# Altium PCB MPPT_charger.PcbDoc
Units mil, origin at the board's own origin, x right, y up, seen from the top; angles counter-clockwise.
Board outline 1965 x 1965 mil, 2 copper layers (Top Layer, Bottom Layer), stack 62.8 mil thick; 68 components, 54 nets, 268 pads, 1306 vias.
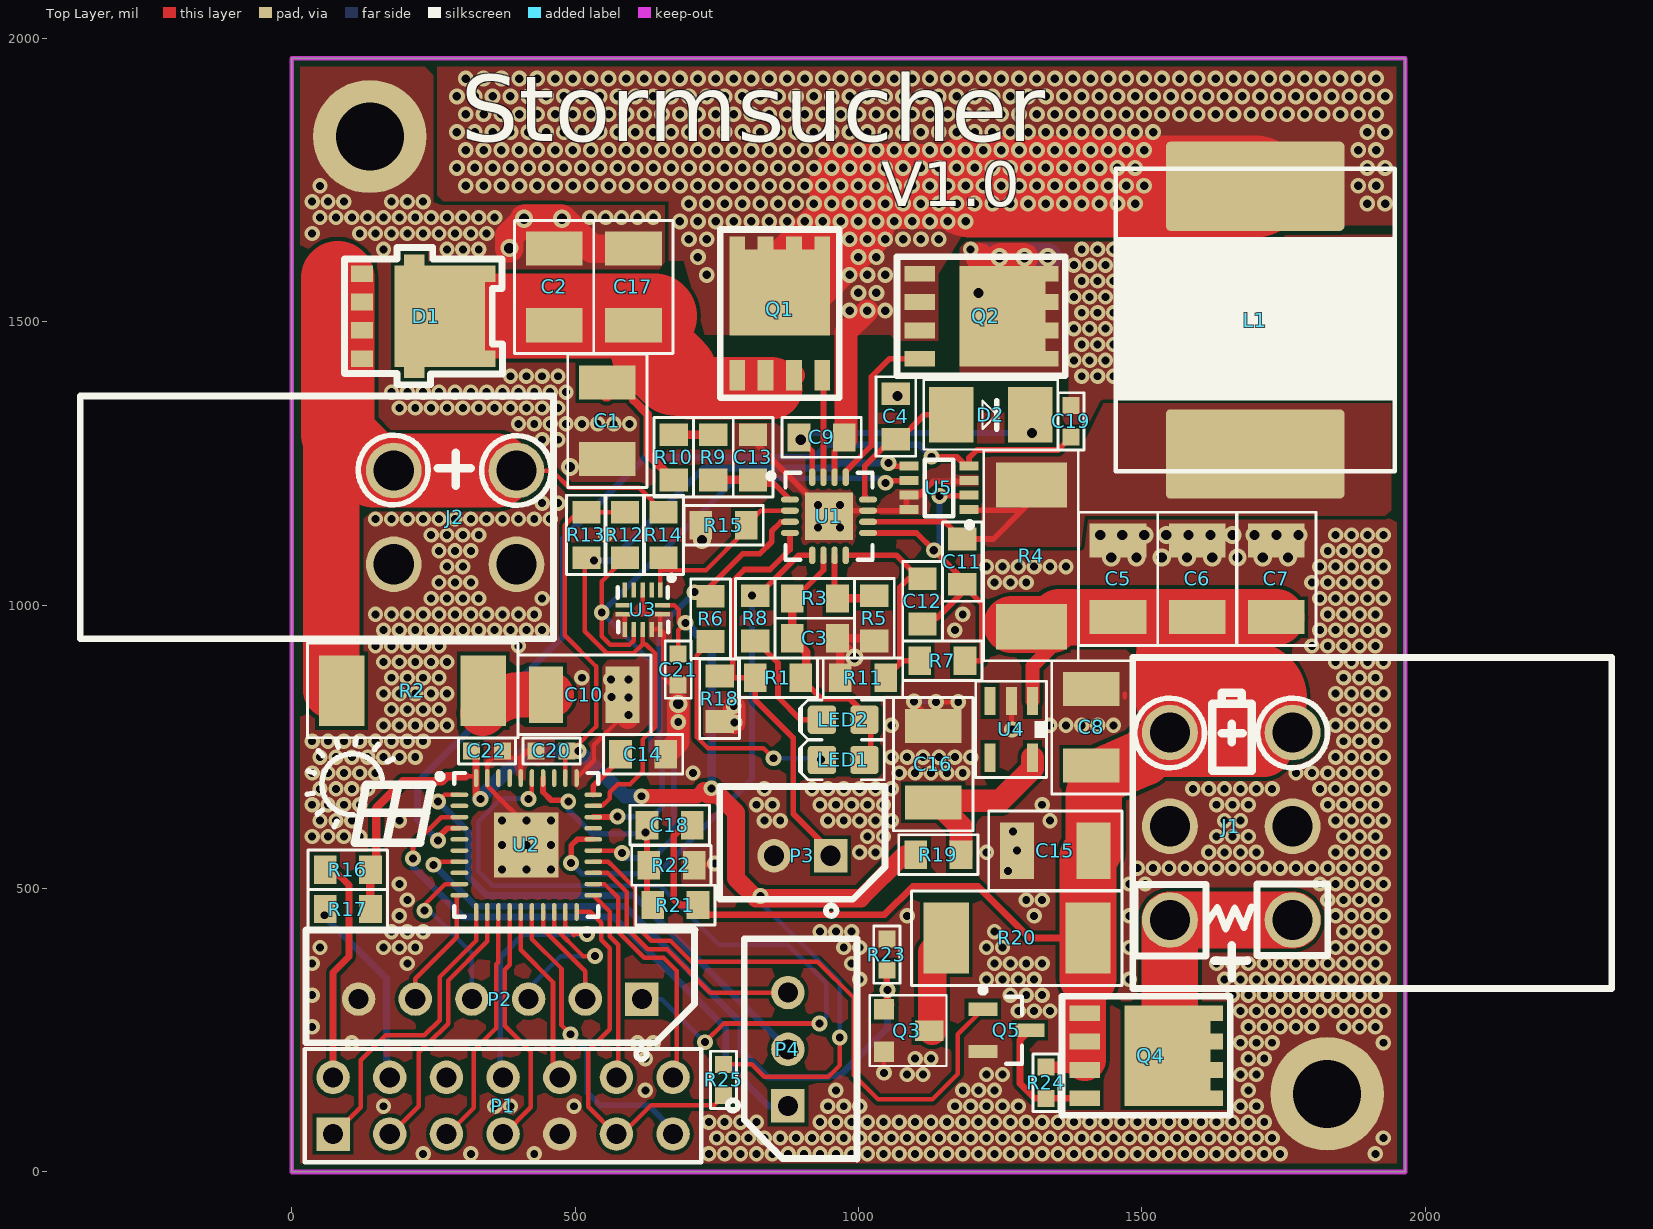
[diagram p0: Top Layer view]
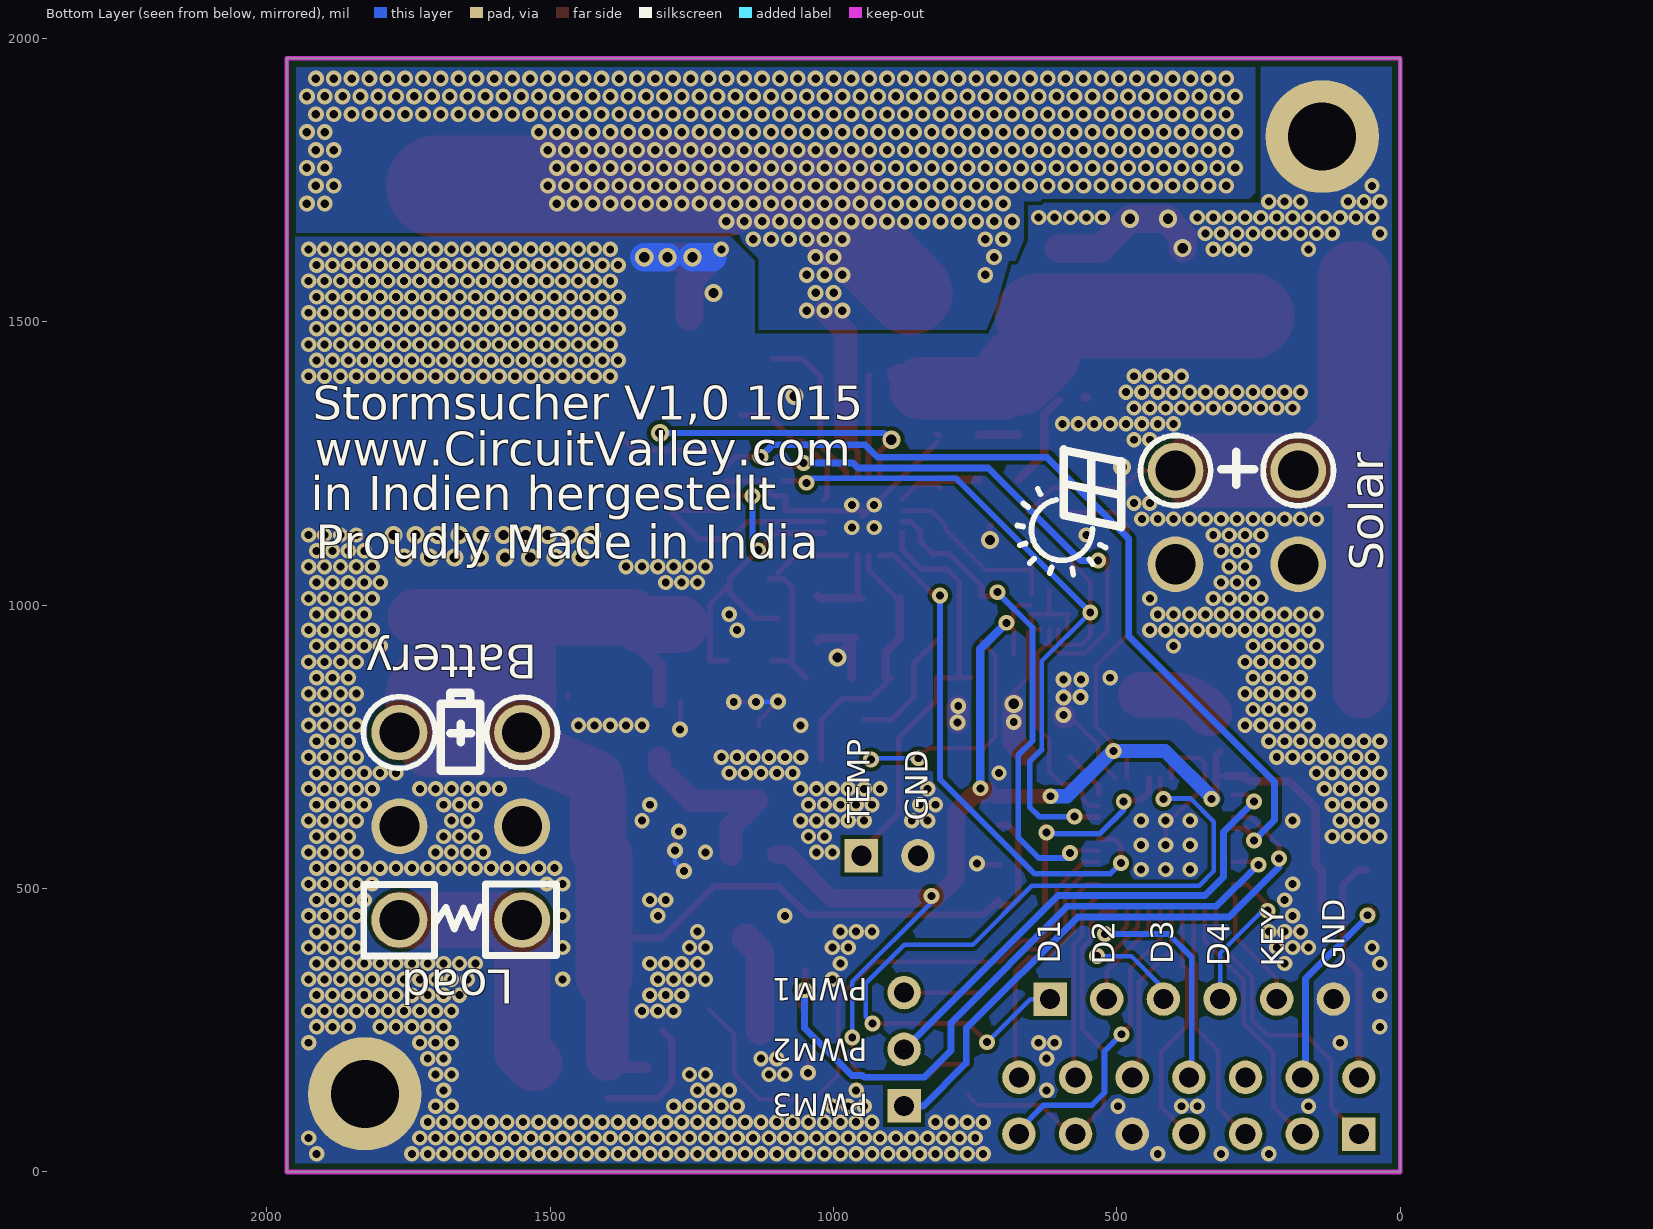
[diagram p1: Bottom Layer view, seen from below]

## Layer stack, top to bottom
Top Solder: solder mask 0.4, Solder Resist, Dk 3.5
Top Layer: signal copper 1.4
Dielectric 1: dielectric 60, FR-4, Dk 4.8
Bottom Layer: signal copper 1.4
Bottom Solder: solder mask 0.4, Solder Resist, Dk 3.5

## Board outline
0,0 1965,0 1965,1965 0,1965

## Design rules (kind name [scope] priority, off if disabled: settings)
Clearance [All] p1: gap=7
HoleSize [All] p1: absolutevalues=TRUE maxlimit=100 minlimit=12 maxpercent=80.000 minpercent=20.000
MinimumSolderMaskSliver [All] p1: minsoldermaskwidth=4
PolygonConnect [All] p1: connectstyle=Direct reliefconductorwidth=10 reliefentries=4 polygonreliefangle="90 Angle" airgapwidth=10
RoutingVias [All] p1: holewidth=20 width=32 viastyle="Through Hole" minholewidth=12 minwidth=25 maxholewidth=200 maxwidth=250
SilkToSolderMaskClearance [IsPad] p1: minsilkscreentomaskgap=6 clearancetoexposedcopper=TRUE
SolderMaskExpansion [All] p1: expansion=4
Width [All] p1: maxlimit=250 minlimit=8 preferedwidth=15
27 further rules are at their usual default settings.

## Components (designator, comment, footprint, x,y, rotation, side; value= is the part's Value field where it differs from the comment)
C1 "10uf" 1210C-GENERIC 557,1393 r270 top
C2 "10uf" 1210C-GENERIC 463,1494 r90 top
C3 "1uf" 0805C-GENERIC 893,942 r0 top
C4 "1uf" 0805C-GENERIC 1066,1303 r90 top
C5 "10uf" 1210C-GENERIC 1458,979 r90 top
C6 "10uf" 1210C-GENERIC 1598,979 r90 top
C7 "10uf" 1210C-GENERIC 1737,979 r90 top
C8 "10uf" 1210C-GENERIC 1411,717 r90 top
C9 "100nf" 0805C-GENERIC 965,1296 r180 top
C10 "2u2" 1210C-GENERIC 449,842 r0 top
C11 "100nf" 0805C-GENERIC 1183,1107 r270 top
C12 "22pf" 0805C-GENERIC 1113,1037 r270 top
C13 "1uf" 0805C-TBD 814,1231 r90 top
C14 "2u2" 0805C-GENERIC 650,737 r180 top
C15 "2u2" 1210C-GENERIC 1415,567 r180 top
C16 "2u2" 1210C-GENERIC 1132,652 r90 top
C17 "10uf" 1210C-GENERIC 603,1494 r90 top
C18 "22pf" 0805C-GENERIC 637,612 r0 top
C19 "100nF" 0603C-GENERIC 1375,1352 r270 top
C20 "100nF" 0603C-GENERIC 486,743 r180 top
C21 "100nF" 0603C-GENERIC 682,914 r270 top
C22 "100nF" 0603C-GENERIC 317,743 r0 top
D1 "NTS1045MFST1G" DFN5_5x6 234,1510 r90 top
D2 "MBRS140" DIODE-SMA 1129,1336 r180 top
J1 "1586041-6" 1586043-6 1766,610 r90 top
J2 "1586041-4" 1586043-4 180,1155 r270 top
L1 "10uh" SRP1238A 1700,1503 r270 top
LED1 "" LED-0805-K 973,727 r180 top
LED2 "" LED-0805-K 973,798 r180 top
P1 "Header 7X2A ISP" HDR2X7_CEN 73,67 r0 top
P2 "Header 6" 5267-06A 368,305 r180 top
P3 "Header 2" 5267-02A 901,558 r180 top
P4 "Header 3" 5267-03A 875.41,216.46 r90 top
Q1 "CSD18540Q5B" SON8 861,1515 r270 top
Q2 "CSD18540Q5B" SON8 1217,1510 r180 top
Q3 "FDN339" SOT23-GDS 1045,287 r0 top
Q4 "N-Mosfet" SON8 1508,205 r180 top
Q5 "BC847" SOT23_N 1261,250 r0 top
R1 "3.5K" 0805R-2K2 888,872 r180 top
R2 "2R / 2W" 2512R-GENERIC 213,849 r180 top
R3 "10K" 0805R-2K2 953,1012 r180 top
R4 "" 2512R-GENERIC 1305,1087 r270 top
R5 "10K" 0805R-2K2 1028,947 r90 top
R6 "1K" 0805R-2K2 739,946 r90 top
R7 "102K" 0805R-2K2 1178,902 r180 top
R8 "1K" 0805R-2K2 818,947 r90 top
R9 "5R" 0805R-2K2 744,1291 r270 top
R10 "5R" 0805R-2K2 674,1231 r90 top
R11 "34.8K" 0805R-2K2 978,872 r0 top
R12 "3.9K" 0805R-2K2 588,1094 r90 top
R13 "3.9K" 0805R-2K2 520,1094 r90 top
R14 "150K" 0805R-2K2 656,1094 r90 top
R15 "50K /NC" 0805R-2K2 732,1141 r0 top
R16 "0R" 0805R-2K2 129,533 r180 top
R17 "0R" 0805R-2K2 129,464 r180 top
R18 "15K" 0805R-2K2 755,865 r270 top
R19 "0R" 0805R-2K2 1111,560 r0 top
R20 "2512R-GENERIC" 2512R-GENERIC 1280,413 r0 top
R21 "105K" 0805R-2K2 707,471 r180 top
R22 "15K" 0805R-2K2 700,541 r180 top
R23 "10K" 0603R-10K 1050,411 r270 top
R24 "10K" 0603R-10K 1331,185 r270 top
R25 "10K" 0603R-10K 762,190 r270 top
U1 "BQ24650RVAT" QFN16 948,1157 r0 top
U2 "MSP430FR5739IRHAR" QFN40 414,577 r0 top
U3 "TPL0102" XQFN14_2mmx2mm 619.16,992.13 r180 top
U4 "TPS709" SOT23-5 1307,831 r270 top
U5 "INA219" SOT23-8 1142,1207 r180 top

## Footprints (in the part's own frame and the unit in brackets; to place one, negate y for a bottom-side part, rotate by r counter-clockwise, add the part's x,y. Pads: shape width x height; smd on the part's side, far side on the other; paste and mask are expansions set on the pad)
0603C-GENERIC [mil] "CAPACITOR 0603"
  rect 30x30 smd: 1(0,0) 2(55,0)
  silkscreen extent -23,-23 78,23, body extent -4,-15 59,15, height 19
0603R-10K [mil] "RESISTOR 0603"
  rect 30x30 smd: 1(0,0) 2(55,0)
  silkscreen extent -23,-23 78,23, body extent -4,-15 59,15, height 20
0805C-GENERIC [mil] "CAPACITOR 0805"
  rect 40x50 smd: 1(-10,0) 2(70,0)
  silkscreen extent -40,-35 100,35, body extent -11,-25 70,25, height 26
0805C-TBD [mil] "CAPACITOR 0805"
  rect 40x50 smd: 1(-10,0) 2(70,0)
  silkscreen extent -40,-35 100,35, body extent -11,-25 70,25, height 26
0805R-2K2 [mil] "RESISTOR 0805"
  rect 40x50 smd: 1(-10,0) 2(70,0)
  silkscreen extent -40,-35 100,35, body extent -11,-25 70,25, height 27
1210C-GENERIC [mil]
  rect 60x100 smd: 1(0,0) 2(135,0)
  silkscreen extent -50,-70 185,70, body extent -10,-50 145,50, height 46
2512R-GENERIC [mil]
  rect 80x125 smd: 1(-125,0) 2(125,0)
  silkscreen extent -186,-84 185,83, body extent -139,-61 136,61, height 19
5267-02A [mm]
  rect 1.5x1.5 hole 0.9: 1(-1.27,0)
  round 1.5 hole 0.9: 2(1.27,0)
  silkscreen extent -3.7,-3.1 3.7,2.7, body extent -3.67,-3.08 3.73,1.82, height 5.81
5267-03A [mm]
  rect 1.5x1.5 hole 0.9: 1(-2.54,0)
  round 1.5 hole 0.9: 2(0,0) 3(2.54,0)
  silkscreen extent -4.92,-3.1 4.95,2.7, body extent -4.9,-3.1 5,1.8, height 5.81
5267-06A [mm]
  rect 1.5x1.5 hole 0.9: 1(-6.35,0)
  round 1.5 hole 0.9: 2(-3.81,0) 3(-1.27,0) 4(1.27,0) 5(3.81,0) 6(6.35,0)
  silkscreen extent -8.73,-3.1 8.7,2.7, body extent -8.67,-3.05 8.73,1.85, height 5.81
1586043-4 [mm]
  round 2.5 hole 1.8: 1(-2.1,0) 2(2.1,0) 3(-2.1,5.5) 4(2.1,5.5)
  silkscreen extent -5.44,-14.05 5.44,7.16, body extent -4.66,-14.06 5.44,6.08, height 11.21
1586043-6 [mm]
  round 2.5 hole 1.8: 1(-4.2,0) 2(0,0) 3(4.2,0) 4(-4.2,5.5) 5(0,5.5) 6(4.2,5.5)
  silkscreen extent -7.26,-14.3 7.57,7.16, body extent -6.93,-14.11 7.37,6.03, height 11.21
DFN5_5x6 [mm]
  rect 0.75x1 smd: 1(-1.905,2.795) 1(-0.635,2.795) 1(0.635,2.795) 1(1.905,2.795)
  rect 0.495x0.905 smd: 2(-2.528,0.452) 2(2.528,0.452)
  rect 0.75x0.475 smd: 2(-1.905,-2.962) 2(1.905,-2.962)
  rect 4.56x4.055 smd: 2(0,-0.697)
  silkscreen extent -3.07,-3.51 3.07,3.58, body extent -2.55,-3.1 2.6,3.05, height 1.13
DIODE-SMA [mm]
  rect 2x2.5 smd: A(-0.875,0) K(-4.425,0)
  silkscreen extent -5.65,-1.58 0.35,1.55, body extent -5.2,-1.3 0,1.3, height 2.4
HDR2X7_CEN [mm] "Connector; Header; 7x2 Position"
  rect 1.5x1.5 hole 0.9: 1(0,0)
  round 1.5 hole 0.9: 2(2.54,0) 3(5.08,0) 4(7.62,0) 5(10.16,0) 6(12.7,0) 7(15.24,0) 8(0,2.54) 9(2.54,2.54) 10(5.08,2.54) 11(7.62,2.54) 12(10.16,2.54) 13(12.7,2.54) 14(15.24,2.54)
  silkscreen extent -1.27,-1.27 16.51,3.81
LED-0805-K [mil]
  round 20 on Mech14: 0(0,0)
  rrect25% 50x50 smd: A(-37.5,0) K(37.5,0)
  Top Layer pour cut-out: -15,30 15,30 15,-30 -15,-30
  silkscreen extent -72,-35 77,35, body extent -39,-25 39,25, height 31
QFN16 [mm]
  oval 0.8x0.28 smd paste-0.025 mask+0.07: 1(-1.75,0.75) 2(-1.75,0.25) 3(-1.75,-0.25) 4(-1.75,-0.75) 9(1.75,-0.75) 10(1.75,-0.25) 11(1.75,0.25) 12(1.75,0.75)
  oval 0.28x0.8 smd paste-0.025 mask+0.07: 5(-0.75,-1.75) 6(-0.25,-1.75) 7(0.25,-1.75) 8(0.75,-1.75) 13(0.75,1.75) 14(0.25,1.75) 15(-0.25,1.75) 16(-0.75,1.75)
  rect 2.14x2.14 smd paste-1.07 mask+0.07: 17(0,0)
  silkscreen extent -2.72,-1.95 1.95,1.95, body extent -1.8,-1.8 1.8,1.8, height 1
QFN40 [mm]
  oval 0.8x0.2 smd: 1(-3,2.25) 2(-3,1.75) 3(-3,1.25) 4(-3,0.75) 5(-3,0.25) 6(-3,-0.25) 7(-3,-0.75) 8(-3,-1.25) 9(-3,-1.75) 10(-3,-2.25) 21(3,-2.25) 22(3,-1.75) 23(3,-1.25) 24(3,-0.75) 25(3,-0.25) 26(3,0.25) 27(3,0.75) 28(3,1.25) 29(3,1.75) 30(3,2.25)
  oval 0.2x0.8 smd: 11(-2.25,-3) 12(-1.75,-3) 13(-1.25,-3) 14(-0.75,-3) 15(-0.25,-3) 16(0.25,-3) 17(0.75,-3) 18(1.25,-3) 19(1.75,-3) 20(2.25,-3) 31(2.25,3) 32(1.75,3) 33(1.25,3) 34(0.75,3) 35(0.25,3) 36(-0.25,3) 37(-0.75,3) 38(-1.25,3) 39(-1.75,3) 40(-2.25,3)
  rect 2.9x2.9 smd: 41(0,0)
  silkscreen extent -4,-3.22 3.22,3.22, body extent -3.08,-3.08 3.08,3.08, height 1
SON8 [mm]
  rect 1.372x0.71 smd: 1(2.77,-0.635) 1(2.77,0.635) 1(2.77,-1.905) 4(2.77,1.905)
  rect 0.59x0.71 smd: 5(-3.15,1.905) 5(-3.15,-0.635) 5(-3.15,0.635) 5(-3.15,-1.905)
  rect 3.85x4.52 smd: 5(-0.941,0)
  silkscreen extent -3.76,-2.67 3.78,2.67, body extent -3.18,-2.5 2.82,2.5, height 1.06
SOT23-5 [mil]
  rect 50x20 smd: 1(0,0) 2(0,-37) 3(0,-75) 4(100,-75) 5(100,0)
  silkscreen extent -35,-100 135,25, body extent 2,-95 98,20, height 52
SOT23-8 [mm]
  rect 0.85x0.4 smd: 1(-1.35,0.975) 2(-1.35,0.325) 3(-1.35,-0.325) 4(-1.35,-0.975) 5(1.35,-0.975) 6(1.35,-0.325) 7(1.35,0.325) 8(1.35,0.975)
  silkscreen extent -1.49,-1.27 0.64,1.78, body extent -1.45,-1.45 1.35,1.45, height 0.97
SOT23-GDS [mil]
  rect 50x36 smd: D(80,-38)
  rect 36x36 smd: G(0,0) S(0,-75)
  silkscreen extent -25,-100 110,25, body extent -3,-95 94,20, height 41
SOT23_N [mm] "SOT23, 3-Leads, Body 2.9x1.3mm, Pitch 0.95mm, Lead Span 2.3mm, IPC Medium Density"
  rect 1.3x0.6 smd: 1(-1.05,0.95) 2(-1.05,-0.95) 3(1.05,0)
  silkscreen extent -1.17,-1.5 0.7,1.92, body extent -0.7,-1.5 0.7,1.5, height 1.1
SRP1238A [mm]
  rrect10% 4x8 smd: 1(-6,0) 2(6,0)
  silkscreen extent -6.78,-6.25 6.78,6.25, body extent -6.25,-6.3 6.25,6.2, height 7.51
XQFN14_2mmx2mm [mm]
  rect 0.2x0.68 smd mask+0.102: 1(-0.8,-0.885)
  rect 0.2x0.68 smd: 2(-0.4,-0.885) 3(0,-0.885) 4(0.4,-0.885) 5(0.8,-0.885) 8(0.8,0.885) 9(0.4,0.885) 10(0,0.885) 11(-0.4,0.885) 12(-0.8,0.885)
  rect 0.68x0.2 smd: 6(0.885,-0.2) 7(0.885,0.2) 13(-0.885,0.2) 14(-0.885,-0.2)
  silkscreen extent -1.4,-1.53 1.12,1.02, body extent -1.02,-1.02 1.02,1.02, height 0.4

## Part data
C1 C2 C5 C6 C7 C8 C10 C15 C16 C17: library part 1210C-2u2-35V, "GENERIC CAPACITOR NON POLARISED 1210"
C3 C4 C9 C11 C12 C14 C18: library part 0805C-2U2-6V3-X5R-PAN, "CAPACITOR 0805 CERAMIC"
C13: library part 0805C-TBD, "CAPACITOR 0805 CERAMIC VALUE TO BE DETERMINED"
C19 C20 C21 C22: library part 0603C-100NF-25V-X7R-TDK, "CAPACITOR 0603 CERAMIC"
D1: library part SK3200
D2: "DIODE"
L1: library part inductor_smd
LED1 LED2: library part LED_SMD_Green_0805, "LED, 0805 SMD, Green"
P1: library part "Header 7X2A", "Header, 7-Pin, Dual row"
P2: "Header, 6-Pin"
P3: "Header, 2-Pin"
P4: "Header, 3-Pin"
Q1 Q2: library part N-Mosfet
Q3: "N-MOS TRANSISTOR FDN339"
Q5: "NPN General-purpose Transistor"
R1 R3 R5 R6 R7 R8 R9 R10 R11 R12 R13 R14 R15 R16 R17 R18 R19 R21 R22: library part 0805R-2K2, "RESISTOR 0805 1/4 WATT THIN FILM"
R2 R4: library part 2512R-GENERIC, "GENERIC RESISTOR 2512"
R20: "GENERIC RESISTOR 2512"
R23 R24 R25: library part 0603R-10K, "GENERIC RESISTOR 0603"
U1: "High Efficiency Synchronous Switch-Mode Charger Controller- Solar Battery Charger, 5 V, -40 to 85 degC, 16-pin VQFN (RVA), Green (RoHS & no Sb/Br)"
U2: "24 MHz Mixed Signal Microcontroller, 1024 B SRAM and 33 GPIOs, -40 to 85 degC, 40-pin QFN (RHA), Green (RoHS & no Sb/Br)"
U3: "Digital Pot 2 channel 256 setp nov volatile memeory"

## Free pads (board coordinates)
  round 200 hole 120: 0(137.8,1827) 1(1827,137.8)

## Via types
v1: diameter 27, hole 14, Top Layer to Bottom Layer, tented both sides, 821 vias
v2: diameter 27.99, hole 15, Top Layer to Bottom Layer, tented both sides, 387 vias
v3: diameter 28, hole 14, Top Layer to Bottom Layer, tented both sides, 52 vias
v4: diameter 32, hole 18, Top Layer to Bottom Layer, tented both sides, 32 vias
v5: diameter 27, hole 14, Top Layer to Bottom Layer, 13 vias
v6: diameter 28, hole 15, Top Layer to Bottom Layer, tented both sides, 1 vias

## Nets (pads, with @x,y where several pads share a name; then routed paths per layer and width w, separated by ;. In a path a pad name is that pad's centre, name@x,y a point inside that pad or via, vN(x,y) a via of type N, cw(c..) or ccw(c..) an arc to the next point about the centre after c; other vN are vias at no path point)
BLOAD: Q3.G R23.2 U2.7 | length 1245.4
  Top Layer w8: v3(250,542) 255.47,547.47 U2.7
  Top Layer w12: R23.2 1050,287 1058,295 1051,302 v3(1051,321)
  Bottom Layer w12: v3(250,542) 251,542 324,469 587,469 793,263 793,214 840,167 945.52,167 949.02,170.5 967.5,170.5 1051,254 v3(1051,321)
CTS: P1.12 U2.15 | length 322.4
  Top Layer w8: U2.15 404.16,391.84 461,335 461,177 P1.12@473,165
GND: C1.2 C2.2 C3.2 C4.2 C5.2 C6.2 C7.2 C8.2 C10.2 C13.2 C14.1 C15.2 C16.2 C17.2 C19.1 C20.2 C21.2 C22.2 J1.2 J1.5 J2.2 J2.4 P1.5 P2.6 P3.2 pad.0 pad.1 Q2.5 Q3.S Q5.2 R5.1 R11.1 R15.1 R18.2 R22.1 R23.1 U1.11 U1.17 U2.31 U2.36 U2.39 U2.41 U3.3 U3.7 U3.8 U3.11 U3.12 U3.13 U4.2 U5.3 U5.7 U5.8 | length 2571.1
  Top Layer w8: 404.16,731.16 354.16,731.16 345.1,722.1 U2.39 345.1,681.25 358,668.36 358,667.36 385.36,640 387,640 414,613 v5(414,577) ; U2.31 533,725.53 533,753 582,802 C10.2@593,802 ; v3(564,838) 565,839 C10.2@594,839 ; C10.2 584,862 C10.2@591,869 ; U3.8 587.66,980.91 U3.7 619.16,984.25 ; U3.3 619.16,984.25 ; U3.11 U3.12 ; C21.2@682,847 656,873 656,951.94 U3.12 ; v3(1045,175) Q3.S ; v3(1098,830) 1132,796 C16.2 ; v3(1137,829) v3(1176,829) ; U4.2 1270,782 v3(1271,781) ; v3(1273,601) 1280,594 v3(1280,567) ; 1470,838 1470,844 ; 619.16,984.25 U3.13 650.65,980.91 U3.12
  Top Layer w10: U2.36 404.16,731.16 416,743 C20.2 ; R22.1@707,542 745,542 v3(747,544) ; R15.1 723,1141 724,1140 v4(724,1115) ; C13.2 C13.2@819,1301 ; C13.2@818,1287 U1.17 948,1166.84 1084.08,1166.84 1084.85,1167.61 1084.85,1193.2 1106.44,1193.2 1132.23,1219 1190.94,1219 U5.3@1191.15,1218.8
  Top Layer w15: R11.1 C3.2@968,937 ; v4@995,910 C3.2@968,937 ; R5.1 1023,942 C3.2 C3.2@968,937
  Top Layer w40: C10.2@593,802 C10.2@593,806 ; C14.1 682,759 v3(682,794) v4(682,826) ; v3(780,822) 781,821 v3(781,793)
  Top Layer w50: v4(384,1630) 384,1652 v4@414,1682 ; v4(410,1682) v4(477,1682) 530,1629 C17.2 ; 1214,1614 1254.05,1573.95 Q2.5@1254.05,1510 ; v4(1249,1614) v4(1293,1614)
  Bottom Layer w8: v3@563,866 564,865 v3(564,838) ; v3@591,869 594,866 v3@594,839 ; v3(1098,830) 1136,830 v3(1137,829) ; v3(1264,531) 1280,547 v3(1280,567) ; v3(1273,601) v3@1276,601
  Bottom Layer w50: 1214,1614 v4(1249,1614) ; v4(1293,1614) v4(1334,1614)
  other v1: 232,32 316,32 428,32 736,32 764,32 792,32 820,32 848,32 876,32 904,32 932,32 960,32 988,32 1016,32 1044,32 1072,32 1100,32 1128,32 1156,32 1184,32 1212,32 1240,32 1268,32 1296,32 1324,32 1352,32 1380,32 1408,32 1436,32 1464,32 1492,32 1520,32 1548,32 1576,32 1604,32 1632,32 1660,32 1688,32 1716,32 1744,32 1912,32 750,60 778,60 806,60 834,60 862,60 890,60 918,60 946,60 974,60 1002,60 1030,60 1058,60 1086,60 1114,60 1142,60 1170,60 1198,60 1226,60 1254,60 1282,60 1310,60 1338,60 1366,60 1394,60 1422,60 1450,60 1478,60 1506,60 1534,60 1562,60 1590,60 1618,60 1646,60 1674,60 1702,60 1730,60 1926,60 736,88 764,88 792,88 820,88 932,88 960,88 988,88 1016,88 1044,88 1072,88 1100,88 1128,88 1156,88 1184,88 1212,88 1240,88 1268,88 1296,88 1324,88 1352,88 1380,88 1408,88 1436,88 1464,88 1492,88 1520,88 1548,88 1576,88 1604,88 1632,88 1660,88 1688,88 1716,88 162,116 358,116 386,116 498,116 946,116 974,116 1002,116 1170,116 1198,116 1226,116 1254,116 1282,116 1674,116 1702,116 624,144 960,144 1184,144 1212,144 1240,144 1688,144 1086,172 1114,172 1226,172 1254,172 1674,172 1702,172 624,200 1100,200 1128,200 1688,200 1716,200 106,228 610,228 638,228 1674,228 1702,228 1730,228 1926,228 36,256 1688,256 1716,256 1744,256 1772,256 1800,256 1856,256 1884,256 1912,256 1282,284 1310,284 1338,284 1674,284 1702,284 1730,284 1758,284 1786,284 1814,284 1842,284 1870,284 1898,284 1926,284 36,312 1268,312 1296,312 1324,312 1660,312 1688,312 1716,312 1744,312 1772,312 1800,312 1828,312 1856,312 1884,312 1912,312 1002,340 1226,340 1254,340 1282,340 1310,340 1478,340 1646,340 1674,340 1702,340 1730,340 1758,340 1786,340 1814,340 1842,340 1870,340 1898,340 1926,340 36,368 204,368 988,368 1240,368 1268,368 1296,368 1324,368 1632,368 1660,368 1688,368 1716,368 1744,368 1772,368 1800,368 1828,368 1856,368 1884,368 1912,368 50,396 162,396 190,396 218,396 974,396 1002,396 1226,396 1254,396 1478,396 1842,396 1870,396 1898,396 1926,396 176,424 204,424 232,424 932,424 960,424 988,424 1240,424 1856,424 1884,424 1912,424 190,452 1086,452 1310,452 1478,452 1842,452 1870,452 1898,452 1926,452 204,480 1296,480 1324,480 1828,480 1856,480 1884,480 1912,480 190,508 1478,508 1506,508 1814,508 1842,508 1870,508 1898,508 1926,508 1492,536 1520,536 1548,536 1576,536 1604,536 1632,536 1660,536 1688,536 1716,536 1744,536 1772,536 1800,536 1828,536 1856,536 1884,536 1912,536 1002,564 1030,564 1226,564 1618,564 1646,564 1674,564 1702,564 1842,564 1870,564 1898,564 1926,564 36,592 64,592 92,592 120,592 1016,592 1044,592 1632,592 1660,592 1688,592 1856,592 1884,592 1912,592 50,620 78,620 106,620 190,620 834,620 862,620 946,620 974,620 1002,620 1030,620 1058,620 1338,620 1646,620 1674,620 1842,620 1870,620 1898,620 1926,620 36,648 64,648 92,648 120,648 820,648 848,648 932,648 960,648 988,648 1016,648 1044,648 1324,648 1632,648 1660,648 1688,648 1828,648 1856,648 1884,648 1912,648 50,676 78,676 106,676 134,676 834,676 918,676 946,676 974,676 1002,676 1030,676 1058,676 1590,676 1618,676 1646,676 1674,676 1702,676 1730,676 1814,676 1842,676 1870,676 1898,676 1926,676 36,704 64,704 92,704 120,704 148,704 708,704 1072,704 1100,704 1128,704 1156,704 1184,704 1772,704 1800,704 1828,704 1856,704 1884,704 1912,704 50,732 78,732 106,732 134,732 162,732 190,732 218,732 1058,732 1086,732 1114,732 1142,732 1170,732 1198,732 1842,732 1870,732 1898,732 1926,732 36,760 64,760 92,760 120,760 148,760 176,760 204,760 232,760 1856,760 1884,760 1912,760 162,788 190,788 218,788 246,788 274,788 1058,788 1338,788 1366,788 1394,788 1422,788 1450,788 1842,788 1870,788 1898,788 1926,788 176,816 204,816 232,816 260,816 1856,816 1884,816 1912,816 162,844 190,844 218,844 246,844 274,844 1842,844 1870,844 1898,844 1926,844 176,872 204,872 232,872 260,872 512,872 1856,872 1884,872 1912,872 162,900 190,900 218,900 246,900 274,900 1842,900 1870,900 1898,900 1926,900 148,928 176,928 204,928 232,928 260,928 400,928 1800,928 1828,928 1856,928 1884,928 1912,928 162,956 190,956 218,956 246,956 274,956 302,956 330,956 358,956 386,956 414,956 442,956 1170,956 1814,956 1842,956 1870,956 1898,956 1926,956 148,984 176,984 204,984 232,984 260,984 288,984 316,984 344,984 372,984 400,984 428,984 1184,984 1828,984 1856,984 1884,984 1912,984 246,1012 274,1012 302,1012 330,1012 442,1012 1814,1012 1842,1012 1870,1012 1898,1012 1926,1012 260,1040 288,1040 316,1040 1240,1040 1268,1040 1296,1040 1800,1040 1828,1040 1856,1040 1884,1040 1912,1040 274,1068 302,1068 1226,1068 1254,1068 1282,1068 1310,1068 1338,1068 1366,1068 1814,1068 1842,1068 1870,1068 1898,1068 1926,1068 260,1096 288,1096 316,1096 1828,1096 1856,1096 1884,1096 1912,1096 246,1124 274,1124 302,1124 330,1124 554,1124 1842,1124 1870,1124 1898,1124 1926,1124 148,1152 176,1152 204,1152 232,1152 260,1152 288,1152 316,1152 344,1152 372,1152 400,1152 428,1152 456,1152 442,1180 470,1180 442,1292 470,1292 400,1320 428,1320 456,1320 484,1320 512,1320 540,1320 568,1320 596,1320 190,1348 218,1348 246,1348 274,1348 302,1348 330,1348 358,1348 386,1348 414,1348 442,1348 470,1348 176,1376 204,1376 232,1376 260,1376 288,1376 316,1376 344,1376 372,1376 400,1376 428,1376 456,1376 484,1376 386,1404 414,1404 442,1404 470,1404 1394,1404 1422,1404 1450,1404 1478,1404 1506,1404 1534,1404 1562,1404 1590,1404 1618,1404 1646,1404 1674,1404 1702,1404 1730,1404 1758,1404 1786,1404 1814,1404 1842,1404 1870,1404 1898,1404 1926,1404 1380,1432 1408,1432 1436,1432 1464,1432 1492,1432 1520,1432 1548,1432 1576,1432 1604,1432 1632,1432 1660,1432 1688,1432 1716,1432 1744,1432 1772,1432 1800,1432 1828,1432 1856,1432 1884,1432 1912,1432 1394,1460 1422,1460 1450,1460 1478,1460 1506,1460 1534,1460 1562,1460 1590,1460 1618,1460 1646,1460 1674,1460 1702,1460 1730,1460 1758,1460 1786,1460 1814,1460 1842,1460 1870,1460 1898,1460 1926,1460 1380,1488 1408,1488 1436,1488 1464,1488 1492,1488 1520,1488 1548,1488 1576,1488 1604,1488 1632,1488 1660,1488 1688,1488 1716,1488 1744,1488 1772,1488 1800,1488 1828,1488 1856,1488 1884,1488 1912,1488 1394,1516 1422,1516 1450,1516 1478,1516 1506,1516 1534,1516 1562,1516 1590,1516 1618,1516 1646,1516 1674,1516 1702,1516 1730,1516 1758,1516 1786,1516 1814,1516 1842,1516 1870,1516 1898,1516 1926,1516 1380,1544 1408,1544 1436,1544 1464,1544 1492,1544 1520,1544 1548,1544 1576,1544 1604,1544 1632,1544 1660,1544 1688,1544 1716,1544 1744,1544 1772,1544 1800,1544 1828,1544 1856,1544 1884,1544 1912,1544 1394,1572 1422,1572 1450,1572 1478,1572 1506,1572 1534,1572 1562,1572 1590,1572 1618,1572 1646,1572 1674,1572 1702,1572 1730,1572 1758,1572 1786,1572 1814,1572 1842,1572 1870,1572 1898,1572 1926,1572 1380,1600 1408,1600 1436,1600 1464,1600 1492,1600 1520,1600 1548,1600 1576,1600 1604,1600 1632,1600 1660,1600 1688,1600 1716,1600 1744,1600 1772,1600 1800,1600 1828,1600 1856,1600 1884,1600 1912,1600 162,1628 274,1628 302,1628 330,1628 1198,1628 1394,1628 1422,1628 1450,1628 1478,1628 1506,1628 1534,1628 1562,1628 1590,1628 1618,1628 1646,1628 1674,1628 1702,1628 1730,1628 1758,1628 1786,1628 1814,1628 1842,1628 1870,1628 1898,1628 1926,1628 36,1656 120,1656 148,1656 176,1656 204,1656 232,1656 260,1656 288,1656 316,1656 344,1656 50,1684 78,1684 106,1684 134,1684 162,1684 190,1684 218,1684 246,1684 274,1684 302,1684 330,1684 358,1684 526,1684 554,1684 582,1684 610,1684 638,1684 36,1712 64,1712 92,1712 176,1712 204,1712 232,1712 50,1740
  other v3: 594,806 594,837.5 563,869 594,869
  other v4: 993,908 1446,1084 1490.57,1084 1535.14,1084 1579.71,1084 1624.29,1084 1668.86,1084 1713.43,1084 1758,1084 1426.56,1124 1465.44,1124 1504.33,1124 1543.22,1124 1582.11,1124 1621,1124 1659.89,1124 1698.78,1124 1737.67,1124 1776.56,1124 491,1244 1069,1369 1212,1551
  other v5: 370.69,533.69 414,533.69 457.31,533.69 370.69,577 457.31,577 370.69,620.31 414,620.31 457.31,620.31 928.31,1137.31 967.69,1137.31 928.31,1176.68 967.69,1176.68
INA_PWR: C19.2 U2.4 U5.4 | length 1717
  Top Layer w10: v3(258,585) 253,585 274.53,606.53 U2.4 ; v3(1129,1262) 1173.54,1262 U5.4@1191.15,1244.39 ; U5.4 1195.15,1260.15 1209,1274 1352,1274 C19.2
  Bottom Layer w12: v3(258,585) 222,621 222,688 479,945 479,1117 623,1261 922,1261 944,1283 1108,1283 v3(1129,1262)
KEY: P2.5 U2.10 | length 215.7
  Top Layer w8: P2.5 218,341 291,414 291,483.53 U2.10
LOAD: J1.1 J1.4 Q4.5 | length 478.1
  Top Layer w100: Q4.5@1528,192 1549.46,213.46 J1.4 J1.1
MPPSET: R14.1 R15.2 U1.2 U3.1 | length 333.9
  Top Layer w8: U3.1@650.65,1017.97 R14.1@650.65,1076.63 ; 652,1062 731,1062 802,1133 R15.2 827.84,1166.84 U1.2
NetC4_1: C4.1 D2.A U1.12 | length 251.5
  Top Layer w10: U1.12 1011,1192.43 1011,1245.77 1054.23,1289 1069,1289 1116,1336 D2.A
NetC9_1: C9.1 L1.1 Q1.5 Q2.1 U1.14 | length 1206.3
  Top Layer w10: U1.14 957.84,1271.84 C9.1@978,1292
  Top Layer w40: C9.1@978,1292 978,1481.93 v2(1015.78,1519.72)
  Top Layer w150: Q1.5@865,1552.05 v2@989.17,1676.22 ; v2@987.17,1739.22 v2@1198.78,1739.22
  Top Layer w180: v2@1198.78,1739.22 L1.1
  other v2: 984.29,1519.72 1047.28,1519.72 1000.04,1551.21 1031.53,1551.21 732.32,1582.71 984.29,1582.71 1015.78,1582.71 1047.28,1582.71 716.57,1614.2 1000.04,1614.2 1031.53,1614.2 700.82,1645.7 732.32,1645.7 984.29,1645.7 1015.78,1645.7 1047.28,1645.7 1078.78,1645.7 1110.27,1645.7 1141.77,1645.7 685.07,1677.2 716.57,1677.2 748.07,1677.2 779.56,1677.2 811.06,1677.2 842.55,1677.2 874.05,1677.2 905.55,1677.2 937.04,1677.2 968.54,1677.2 1000.04,1677.2 1031.53,1677.2 1063.03,1677.2 1094.52,1677.2 1126.02,1677.2 1157.52,1677.2 1189.01,1677.2 700.82,1708.69 732.32,1708.69 763.81,1708.69 795.31,1708.69 826.81,1708.69 858.3,1708.69 889.8,1708.69 921.29,1708.69 952.79,1708.69 984.29,1708.69 1015.78,1708.69 1047.28,1708.69 1078.78,1708.69 1110.27,1708.69 1141.77,1708.69 1173.26,1708.69 1204.76,1708.69 1236.26,1708.69 1267.75,1708.69 1299.25,1708.69 1330.74,1708.69 1362.24,1708.69 1393.74,1708.69 1425.23,1708.69 1456.73,1708.69 1488.22,1708.69 1897.67,1708.69 1929.17,1708.69 307.12,1740.19 338.62,1740.19 370.11,1740.19 401.61,1740.19 433.11,1740.19 464.6,1740.19 496.1,1740.19 527.59,1740.19 559.09,1740.19 590.59,1740.19 622.08,1740.19 653.58,1740.19 685.07,1740.19 716.57,1740.19 748.07,1740.19 779.56,1740.19 811.06,1740.19 842.55,1740.19 874.05,1740.19 905.55,1740.19 937.04,1740.19 968.54,1740.19 1000.04,1740.19 1031.53,1740.19 1063.03,1740.19 1094.52,1740.19 1126.02,1740.19 1157.52,1740.19 1189.01,1740.19 1220.51,1740.19 1252,1740.19 1283.5,1740.19 1315,1740.19 1346.49,1740.19 1377.99,1740.19 1409.48,1740.19 1440.98,1740.19 1472.48,1740.19 1503.97,1740.19 1881.93,1740.19 1913.42,1740.19 291.37,1771.69 322.87,1771.69 354.37,1771.69 385.86,1771.69 417.36,1771.69 448.85,1771.69 480.35,1771.69 511.85,1771.69 543.34,1771.69 574.84,1771.69 606.33,1771.69 637.83,1771.69 669.33,1771.69 700.82,1771.69 732.32,1771.69 763.81,1771.69 795.31,1771.69 826.81,1771.69 858.3,1771.69 889.8,1771.69 921.29,1771.69 952.79,1771.69 984.29,1771.69 1015.78,1771.69 1047.28,1771.69 1078.78,1771.69 1110.27,1771.69 1141.77,1771.69 1173.26,1771.69 1204.76,1771.69 1236.26,1771.69 1267.75,1771.69 1299.25,1771.69 1330.74,1771.69 1362.24,1771.69 1393.74,1771.69 1425.23,1771.69 1456.73,1771.69 1488.22,1771.69 1897.67,1771.69 1929.17,1771.69 307.12,1803.18 338.62,1803.18 370.11,1803.18 401.61,1803.18 433.11,1803.18 464.6,1803.18 496.1,1803.18 527.59,1803.18 559.09,1803.18 590.59,1803.18 622.08,1803.18 653.58,1803.18 685.07,1803.18 716.57,1803.18 748.07,1803.18 779.56,1803.18 811.06,1803.18 842.55,1803.18 874.05,1803.18 905.55,1803.18 937.04,1803.18 968.54,1803.18 1000.04,1803.18 1031.53,1803.18 1063.03,1803.18 1094.52,1803.18 1126.02,1803.18 1157.52,1803.18 1189.01,1803.18 1220.51,1803.18 1252,1803.18 1283.5,1803.18 1315,1803.18 1346.49,1803.18 1377.99,1803.18 1409.48,1803.18 1440.98,1803.18 1472.48,1803.18 1503.97,1803.18 1881.93,1803.18 1913.42,1803.18 291.37,1834.68 322.87,1834.68 354.37,1834.68 385.86,1834.68 417.36,1834.68 448.85,1834.68 480.35,1834.68 511.85,1834.68 543.34,1834.68 574.84,1834.68 606.33,1834.68 637.83,1834.68 669.33,1834.68 700.82,1834.68 732.32,1834.68 763.81,1834.68 795.31,1834.68 826.81,1834.68 858.3,1834.68 889.8,1834.68 921.29,1834.68 952.79,1834.68 984.29,1834.68 1015.78,1834.68 1047.28,1834.68 1078.78,1834.68 1110.27,1834.68 1141.77,1834.68 1173.26,1834.68 1204.76,1834.68 1236.26,1834.68 1267.75,1834.68 1299.25,1834.68 1330.74,1834.68 1362.24,1834.68 1393.74,1834.68 1425.23,1834.68 1456.73,1834.68 1488.22,1834.68 1519.72,1834.68 1897.67,1834.68 1929.17,1834.68 307.12,1866.17 338.62,1866.17 370.11,1866.17 401.61,1866.17 433.11,1866.17 464.6,1866.17 496.1,1866.17 527.59,1866.17 559.09,1866.17 590.59,1866.17 622.08,1866.17 653.58,1866.17 685.07,1866.17 716.57,1866.17 748.07,1866.17 779.56,1866.17 811.06,1866.17 842.55,1866.17 874.05,1866.17 905.55,1866.17 937.04,1866.17 968.54,1866.17 1000.04,1866.17 1031.53,1866.17 1063.03,1866.17 1094.52,1866.17 1126.02,1866.17 1157.52,1866.17 1189.01,1866.17 1220.51,1866.17 1252,1866.17 1283.5,1866.17 1315,1866.17 1346.49,1866.17 1377.99,1866.17 1409.48,1866.17 1440.98,1866.17 1472.48,1866.17 1503.97,1866.17 1535.47,1866.17 1566.97,1866.17 1598.46,1866.17 1629.96,1866.17 1661.45,1866.17 1692.95,1866.17 1724.45,1866.17 1755.94,1866.17 1787.44,1866.17 1818.93,1866.17 1850.43,1866.17 1881.93,1866.17 1913.42,1866.17 291.37,1897.67 322.87,1897.67 354.37,1897.67 385.86,1897.67 417.36,1897.67 448.85,1897.67 480.35,1897.67 511.85,1897.67 543.34,1897.67 574.84,1897.67 606.33,1897.67 637.83,1897.67 669.33,1897.67 700.82,1897.67 732.32,1897.67 763.81,1897.67 795.31,1897.67 826.81,1897.67 858.3,1897.67 889.8,1897.67 921.29,1897.67 952.79,1897.67 984.29,1897.67 1015.78,1897.67 1047.28,1897.67 1078.78,1897.67 1110.27,1897.67 1141.77,1897.67 1173.26,1897.67 1204.76,1897.67 1236.26,1897.67 1267.75,1897.67 1299.25,1897.67 1330.74,1897.67 1362.24,1897.67 1393.74,1897.67 1425.23,1897.67 1456.73,1897.67 1488.22,1897.67 1519.72,1897.67 1551.22,1897.67 1582.71,1897.67 1614.21,1897.67 1645.71,1897.67 1677.2,1897.67 1708.7,1897.67 1740.19,1897.67 1771.69,1897.67 1803.19,1897.67 1834.68,1897.67 1866.18,1897.67 1897.67,1897.67 1929.17,1897.67 307.12,1929.17 338.62,1929.17 370.11,1929.17 401.61,1929.17 433.11,1929.17 464.6,1929.17 496.1,1929.17 527.59,1929.17 559.09,1929.17 590.59,1929.17 622.08,1929.17 653.58,1929.17 685.07,1929.17 716.57,1929.17 748.07,1929.17 779.56,1929.17 811.06,1929.17 842.55,1929.17 874.05,1929.17 905.55,1929.17 937.04,1929.17 968.54,1929.17 1000.04,1929.17 1031.53,1929.17 1063.03,1929.17 1094.52,1929.17 1126.02,1929.17 1157.52,1929.17 1189.01,1929.17 1220.51,1929.17 1252,1929.17 1283.5,1929.17 1315,1929.17 1346.49,1929.17 1377.99,1929.17 1409.48,1929.17 1440.98,1929.17 1472.48,1929.17 1503.97,1929.17 1535.47,1929.17 1566.97,1929.17 1598.46,1929.17 1629.96,1929.17 1661.45,1929.17 1692.95,1929.17 1724.45,1929.17 1755.94,1929.17 1787.44,1929.17 1818.93,1929.17 1850.43,1929.17 1881.93,1929.17 1913.42,1929.17
NetC9_2: C9.2 D2.K U1.16 | length 499.4
  Top Layer w10: v4(898,1292) 918.47,1271.53 U1.16 ; D2.K@1303.21,1299 1303.21,1301.21 v4(1306,1304)
  Bottom Layer w10: v4@902,1288 v4(898,1292) 910,1304 v4(1306,1304)
NetC10_1: C10.1 R2.1 | length 141.8
  Top Layer w80: R2.1@337,809 341.71,813.71 cw(c412.42,743) 412.42,843 ; 401.42,842 C10.1@458,842
NetC11_1: C11.1 L1.2 R4.1 U1.10 U5.1 | length 453.8
  Top Layer w10: U1.10 1152.84,1147.16 C11.1 1238,1117 1288.61,1167.61 ; U5.1@1191.15,1167.61 1288.61,1167.61 ; R4.1 1305,1184 1288.61,1167.61
NetC12_1: C12.1 R7.2 R11.2 U1.8 | length 387
  Top Layer w10: U1.8 1066.9,1088.1 C12.1@1098,1057 ; R11.2 1073,897 ; R7.2 1078,902 1073,897 ; C12.1 1088,1047 1073,1032 1073,897
NetC13_1: C13.1 R9.2 U1.1 | length 150.4
  Top Layer w10: C13.1@813,1207 820,1214 851.63,1214 U1.1
  Top Layer w15: R9.2 C13.1
NetC14_2: C14.2 U2.30 | length 87.5
  Top Layer w10: U2.30 532.11,681.11 C14.2@583,732
NetC16_1: C16.1 R19.2 U4.5 | length 328.7
  Top Layer w40: R19.2 1181,609 1135,655 1250,655 1307,712 U4.5
NetLED1_K: LED1.K R6.1 | length 414.1
  Top Layer w8: R6.1 715,912 715,767 734,748 832,748 v3(850,730)
  Bottom Layer w8: v3(850,730) 932,730 v3(934,728)
NetLED2_K: LED2.K R8.1 | length 221.2
  Top Layer w10: R8.1 819,937 858,898 858,838 898,798 LED2.K@946.5,798
NetP1_8: P1.8 R16.2 | length 405.8
  Top Layer w12: R16.2 74,533 101,506 101,380 73,352 P1.8@73,165
NetP1_9: P1.9 R17.2 | length 359.4
  Top Layer w12: R17.2@53,464 48,459 54,453 v3(58,453)
  Bottom Layer w12: v3(58,453) 55,453 167,341 167,171 P1.9@173,165
NetQ1_4: Q1.4 U1.15 | length 180.9
  Top Layer w10: Q1.4 938.16,1403.79 U1.15
NetQ2_4: Q2.4 U1.13 | length 294.1
  Top Layer w10: U1.13 977.53,1236.34 1023,1281.81 1023,1403 1055,1435 Q2.4
NetQ3_D: Q3.D R20.1 | length 174.4
  Top Layer w50: Q3.D@1130,249 1130,388 R20.1
NetQ4_4: Q4.4 Q5.3 R24.2 | length 225.9
  Top Layer w12: Q5.3 1285,232.66 1285,156 1311,130 R24.2 Q4.4
NetR3_1: R3.1 R5.2 U1.7 | length 162.3
  Top Layer w10: U1.7 957.84,1021.84 948,1012 R3.1
  Top Layer w15: R3.1 1023,1012 R5.2
NetR9_1: R9.1 R10.2 | length 70
  Top Layer w15: R10.2 R9.1
PWM1: P4.3 U2.23 | length 468.2
  Top Layer w8: U2.23 557.21,527.79 591,494 591,430.21 628.21,393 662.21,393 738.75,316.46 P4.3
PWM2: P4.2 U2.1 | length 888
  Top Layer w8: v3(258,654) 269.58,665.58 U2.1
  Bottom Layer w12: v3(258,654) 312,600 312,520.4 344.4,488 603.88,488 P4.2
PWM3: P4.1 U2.3 | length 1012.6
  Top Layer w8: v3(214,553) 214,576.36 263.86,626.21 U2.3
  Bottom Layer w12: v3(214,553) 214,538 302,450 569,450 766,253 766,192 841.54,116.46 P4.1
R\S\T\: P1.6 R25.2 U2.20 | length 686.9
  Top Layer w8: U2.20 527.11,458.89 546,440 546,410 561,395 561,252 523,214 523,115 573,65 581,65 634,118 745,118 R25.2
RTS: P1.7 U2.16 | length 546.9
  Top Layer w8: U2.16 423.84,411.16 476,359 476,259 v3(492,243)
  Bottom Layer w10: v3(492,243) 522,213 522,140 544,118 629,118 673,74 P1.7@673,65
RX: P1.14 U2.22 | length 437.9
  Top Layer w8: U2.22 551.9,508.1 576,484 576,424 622,378 656,378 679,355 679,171 P1.14@673,165
SCL: R13.1 U2.29 U3.10 U5.5 | length 1276.8
  Top Layer w8: R13.1 517,1081 517,1079 517,954 556,915 603,915 619.16,931.16 ; U2.29@532.21,646 U2.29 547.9,645.9 561,659 561,670 575,684 597,684 619,706 619,763 641,785 641,915 624.84,931.16 619.16,931.16 ; U3.10 619.16,931.16
  Top Layer w10: v3(1053,1251) 1058.61,1245.39 U5.5
  Bottom Layer w12: v3(533,1079) 564,1079 727,1242 957,1242 966,1251 v3(1053,1251)
SDA: R12.1 U2.28 U3.9 U5.6 | length 1402.7
  Top Layer w8: R12.1@585,1080 547,1042 v3(547,987) 547,945.21 562.21,930 596,930 603.41,937.41 U3.9
  Top Layer w10: U2.28 574.21,626.21 v3(575,627) ; v3@1053,1216 v3(1048,1216) 1051.8,1219.8 U5.6
  Bottom Layer w8: v3(547,987) 633,901 633,745
  Bottom Layer w10: v3(547,987) 784,1224 1040,1224 v3(1048,1216) ; v3(575,627) 637,627 654,644 654,724 633,745
SLED1: P2.1 U2.35 | length 1363.2
  Top Layer w8: v3(418,658) 423.84,663.84 U2.35 ; v3(729,229) 762,262 v3(931,262)
  Bottom Layer w8: v3(418,658) 417,659 370,659 329,618 329,531 355,505 650,505 754,401 875.28,401 943,333.28 943,274 v3(931,262) ; P2.1 653,305 v3(729,229)
SLED2: P2.2 U2.17 | length 184.7
  Top Layer w8: U2.17 443.53,428.47 518,354 P2.2
SLED3: P2.3 U2.18 | length 279.5
  Top Layer w8: U2.18 463.21,431.79 514,381 v3(535,381)
  Bottom Layer w8: P2.3 418,324 475,381 v3(535,381)
SLED4: P2.4 U2.9 | length 283.3
  Top Layer w8: v3(234,461) 234,471 271.1,508.1 U2.9
  Bottom Layer w8: v3(234,461) 243,461 318,386 P2.4
SOLAR: D1.1 J2.1 J2.3 R2.2 R14.2 | length 1362.9
  Top Layer w8: J2.3@361.54,1237.68 J2.3 459.14,1237.68 489.82,1207 613,1207 R14.2
  Top Layer w100: R2.2@70,850.04 70,1275.12 cw(c107.56,1275.12) 81,1301.68
  Top Layer w130: 81,1578 81,1301.68 145,1237.68 J2.1 J2.3@361.54,1237.68
STAT1: R6.2 U1.3 U2.25 | length 886.4
  Top Layer w8: U2.25 578.84,567.16 v3(583,563)
  Top Layer w10: v3(711,1023) 718,1016 R6.2 739,1034 796,1091 826,1091 847,1112 847,1131 863.16,1147.16 U1.3
  Bottom Layer w10: v3(583,563) 583,556 581,554 638,554 674,590 674,735.68 649,760.68 649,961 v3(711,1023)
STAT2: R8.2 U1.5 U2.26 | length 930.6
  Top Layer w10: v3(493,545) 493,576 503.84,586.84 U2.26 ; v3(812,1017) R8.2 823,1017 894.1,1088.1 U1.5
  Bottom Layer w10: v3(493,545) 512,526 645,526 812,693 v3(812,1017)
SYS_OUT: Q5.1 U2.24 | length 1085.2
  Top Layer w8: U2.24 558.31,547.47 563,542.79 563.43,542.79 606,500.21 606,436.43 634.43,408 668.43,408 705.43,371 928,371 992,307 992,171 1035,128 1130,128 1175,173 1175,242.74 Q5.1
TCK: P1.4 U2.14 | length 436.7
  Top Layer w8: P1.4@373,65 422,114 422,212 376,258 376,357 384.47,365.47 U2.14
TDI: P1.2 U2.12 | length 465.9
  Top Layer w8: P1.2@173,65 224,116 224,211 239,226 240.21,226 276,261.79 276,337.79 345.1,406.89 U2.12
TDO: P1.1 U2.11 | length 538.3
  Top Layer w8: P1.1@73,65 122,114 122,197 166,241 234,241 261,268 261,344 325.42,408.42 U2.11
TEST: P1.11 U2.19 | length 456.8
  Top Layer w8: U2.19 482.9,433.32 498.11,418.11 500,420 v3(521,420)
  Bottom Layer w10: P1.11@373,165 368,170 368,379 409,420 v3(521,420)
TMS: P1.3 U2.13 | length 431.9
  Top Layer w8: P1.3@273,65 321,113 321,214 361,254 361,366.43 364.79,370.21 U2.13
TS: P3.1 R1.2 R18.1 U1.4 | length 718.6
  Top Layer w10: R18.1@758,872 R1.2 818,833 885,766 885,632 P3.1@936,581 ; R18.1@778,877 778,1042 798.99,1062.99 843.99,1062.99 879.1,1098.1 U1.4
TX: P1.13 U2.21 | length 344.6
  Top Layer w8: U2.21 561,459.53 561,416.21 576,401.21 576,165 P1.13@573,165
VBADC: C18.1 R21.2 R22.2 U2.34 | length 385.2
  Top Layer w10: U2.34 443.53,670.47 458,656 486,656 v3(488,654) ; R21.2@627,471 C18.1@627,611
  Bottom Layer w10: v3(488,654) 488,639 530,597 622,597 v3(624,599)
VBAT: C5.1 C6.1 C7.1 C8.1 C11.2 C12.2 C15.1 C18.2 J1.3 J1.6 Q4.1 R4.2 R7.1 R20.2 R21.1 R24.1 U1.9 U4.1 U5.2 | length 3327.5
  Top Layer w10: U1.9 1102.53,1127.47 v6(1133,1097) 1183,1047 C11.2 ; C12.2@1098,977 1138,977 1183,1022 C11.2 ; v3(1143,1193) 1143.2,1193.2 U5.2@1191.15,1193.2 ; R7.1 1218,902 1218,1002 C11.2 ; 1220,965 1270,965 R4.2@1271,966
  Top Layer w12: R21.1@707,471 685,471 674,482 674,593 693,612 C18.2 ; R21.1@709,480 735,454 1046,454 1096,504 1211,504 1302,413 R20.2
  Top Layer w20: R24.1 1393.94,185 1398.94,180 1398.94,197.94 1399,198
  Top Layer w25: U4.1 1307,893 R4.2@1356,942
  Top Layer w75: 1399,198 1399,279.94 1398.94,280 1398.94,335.94 1405,342 ; C8.1@1406.09,689.36 C8.1@1420.29,695.5
  Top Layer w100: R4.2@1271,966 1341,966 1354,979 C5.1 C6.1 C7.1 ; 1405,342 R20.2 1405,557 C15.1 1415,666 ; C8.1@1420.29,695.5 1503.09,731.3 1518.29,746.5 1714.8,746.5
  Top Layer w200: 1590,910 1590,852 1589,851 1589,836 1691,836
  Bottom Layer w10: v6(1133,1097) 1143,1107 v3(1143,1193)
VINP: C1.1 C2.1 C17.1 D1.2 Q1.1 R10.1 | length 837.6
  Top Layer w15: C1.1@553,1367 C1.1@558,1367 ; 603,1362 628,1337 628,1266 ; 629,1266 R10.1
  Top Layer w40: Q1.1@846,1383 863.06,1383 Q1.1@886,1405.94
  Top Layer w100: 675,1410 702,1383
  Top Layer w110: 702,1383 Q1.1@846,1383
  Top Layer w150: D1.2@261.44,1510 C17.1@640,1510 ; 638,1447 675,1410
VLOGIC: C20.1 C21.1 C22.1 R12.2 R13.2 R16.1 R17.1 R19.1 R25.1 U2.32 U2.40 U3.14 | length 3099.6
  Top Layer w8: 307,698 322.53,698 U2.40 ; U2.32 482.9,739.9 C20.1 C20.1@494,743 ; C20.1@500,749 537,786 537,892 482,947 482,1141 505,1164 R13.2 R12.2 ; U3.14 675.28,1000 683.16,992.13 v3@683.16,969 ; C21.1 682,956 v3(695,969) ; R25.1 812,190 834,168 947,168 967,188 v3(967,237)
  Top Layer w12: C22.1 325.42,734.58 U2.40 325.42,664.58 332,658 v3(333,658)
  Top Layer w15: R17.1 R16.1 149,543 149,642 196,689 265,689 274,698 307,698
  Top Layer w25: v3(617,663) 715,663 726,674
  Top Layer w32: 727.81,672.19 734,666 752,666 784,634 784,518 v3@819,483 ; v3@827,483 1004,483 1081,560 R19.1
  Bottom Layer w8: v3(827,487) 827,476 967,336 v3(967,237)
  Bottom Layer w15: v3(695,969) 741,923 v3(741,677)
  Bottom Layer w25: v3(333,658) 330,658 415,743 v3(506,743) 508,743 588,663 v3(617,663)
VREF: C3.1 LED1.A LED2.A R1.1 R3.2 U1.6 | length 477.4
  Top Layer w10: R3.2 888,1012 938.16,1062.16 U1.6 ; R1.1 935,835 984.5,835 1021.5,798 LED1.A@1021.5,727
  Top Layer w15: R3.2 C3.1 908,917 R1.1@908,872
pads on no net: LED1.0 LED2.0 P1.10 U2.2 U2.5 U2.6 U2.8 U2.27 U2.33 U2.37 U2.38 U3.2 U3.4 U3.5 U3.6 U4.3 U4.4

## Polygon pours and split planes (outlines as drawn)
NetC9_1 on Bottom Layer "Top Layer-No Net" (solid, pour order 11): 728,1476.5 691,1607.5 664,1607.5 664,1712.5 256,1712.5 256,1949.5 585,1949.5 1948,1949.5 1948,1655 1166.02,1655 1140,1583.72 1140,1466.5 1065,1466.5 1062,1469.5 1055,1476.5
GND on Bottom Layer "Top Layer-No Net" (solid, pour order 8): 15,15 15,1950 246,1950 246,1710 658,1710 726,1479 1139,1479 1139,1608 1181,1650 1950,1650 1950,15
GND on Top Layer "Top Layer-No Net" (solid, pour order 14): 1399.04,1158 1950,1158 1950,15 1399.04,15 1399.04,1158
GND on Top Layer "Top Layer-No Net" (solid, pour order 13): 1179,1646 1179,1403 1371,1403 1371,1313 1392,1292 1461,1361 1950,1361 1950,1654 1857,1654 1754,1654 1746,1646
NetC11_1 on Top Layer "Top Layer-No Net" (solid, pour order 12): 1392.04,1103 1217,1103 1217,1274 1350,1274 1392.04,1274 1432,1356 1940,1356 1940,1168 1930,1158 1399.04,1158
NetC9_1 on Top Layer "Top Layer-No Net" (solid, pour order 10): 729,1477 692,1608 665,1608 665,1713 257,1713 257,1950 586,1950 1949,1950 1949,1670.5 1194,1670.5 1141,1584.22 1141,1467 1066,1467 1063,1470 1056,1477
GND on Top Layer "Top Layer-No Net" (solid, pour order 9): 15,1950 250,1950 250,1913 250,1710 283,1710 658,1710 658,1641 658,1602 687,1602 690,1602 690,1346 690,1340 1091,1340 1422,1340 1422,15 15,15 15,1950
no net on Top Overlay "Top Layer-No Net" (solid): 1456,1649 1456,1362 1948,1362 1946,1362 1946,1649

## Keep-outs
Keep-Out Layer:
  the board outline again, w8

## Silkscreen, mask and mechanical layers (free items; w line width, h text height)
Top Overlay:
  circle w10: c179,1238.68 r61.51
  circle w10: c396.54,1237.68 r61.51
  circle w10: c1549,774.68 r61.51
  circle w10: c1766,774.68 r61.51
  lines w10: 27.14,666.28 38,668 ; 29.54,707.4 40,704 ; 45.1,631.53 54,638 ; 47.22,742.78 55,735 ; 75.01,609.2 80,619 ; 78.6,760.46 82,750 ; 108.58,630.17 cw(c107,684) 159.92,693.98 ; 112,754 113.72,764.86 ; 146.18,745.5 152.65,754.4 ; 168.77,723.79 178.58,728.78
  lines w12: 1615,440 1633,467 1648,429 1664,466 1680,431 1693.28,467.53 ; 1488,381 1613,381 1613,507 1488,507 1488,381 ; 1703,382 1703,508 1828,508 1828,382 1703,382
  lines w15: 111,581 227,581 ; 111.56,582.5 131.77,683 ; 122,634 237,634 ; 133,683 248,683 ; 167.17,580.97 187.69,683 ; 226.13,580.77 246.69,683 ; 258,1242 316,1242 ; 289,1211 289,1269 ; 1628,373 1686,373 ; 1641,774 1678,774 ; 1659,342 1659,400 ; 1659,758 1659,791 ; 1689,826 1641,826 ; 1641,826 1624,826 1624,708 1694,708 1694,826 1676,826 1676,846 1641,846 1641,826
  text "Stormsucher" at 298,1819 h118.11
  text "V1.0" at 1040,1704 h78.74
Bottom Overlay:
  circle w10: c1766,775.35 r63.23
  circle w10: c1549.46,775.35 r62.49
  circle w10: c396.54,1237.68 r61.86
  circle w10: c180,1237.68 r62.02
  lines w10: 520.2,1102.01 530,1107 ; 542.53,1072.1 549,1081 ; 543.17,1134.58 ccw(c597,1133) 606.98,1185.92 ; 577.28,1054.14 579,1065 ; 615,1067 618.4,1056.54 ; 634.79,1195.77 639.78,1205.58 ; 646,1082 653.78,1074.22 ; 656.5,1173.18 665.4,1179.65 ; 661,1109 671.46,1105.6 ; 665,1139 675.86,1140.72
  lines w12: 1623.72,467.53 1637,431 1653,466 1669,429 1684,467 1702,440 ; 1489,382 1489,508 1614,508 1614,382 1489,382 ; 1704,381 1829,381 1829,507 1704,507 1704,381
  lines w15: 258,1240 316,1240 ; 289,1213 289,1271 ; 491.77,1253.13 594,1273.69 ; 491.97,1194.17 594,1214.69 ; 492,1138 492,1254 ; 493.5,1138.56 594,1158.77 ; 545,1149 545,1264 ; 594,1160 594,1275 ; 1623,826 1623,708 1693,708 1693,826 1676,826 ; 1628,826 1676,826 ; 1639,774 1676,774 ; 1641,826 1641,846 1676,846 1676,826 ; 1658,758 1658,791
  text "Stormsucher V1,0 1015" at 1919,1327 h60
  text "www.CircuitValley.com" at 1915,1246 h60
  text "in Indien hergestellt" at 1922,1168 h60
  text "Proudly Made in India" at 1914,1082 h60
  text "Solar" at 30,1061 h60 r270
  text "Battery" at 1523,930 h60 r180
  text "GND" at 834,620 h40 r270
  text "TEMP" at 936,615 h40 r270
  text "D3" at 400.67,366.79 h40 r270
  text "D1" at 600,367 h40 r270
  text "D2" at 504,366 h40 r270
  text "D4" at 301,362.79 h40 r270
  text "KEY" at 206,362 h40 r270
  text "GND" at 98,357 h40 r270
  text "Load" at 1564,357 h60 r180
  text "PWM1" at 940,342 h40 r180
  text "PWM2" at 940,235 h40 r180
  text "PWM3" at 939,138 h40 r180